# EAGLE board charger (EAGLE 7.4.0)
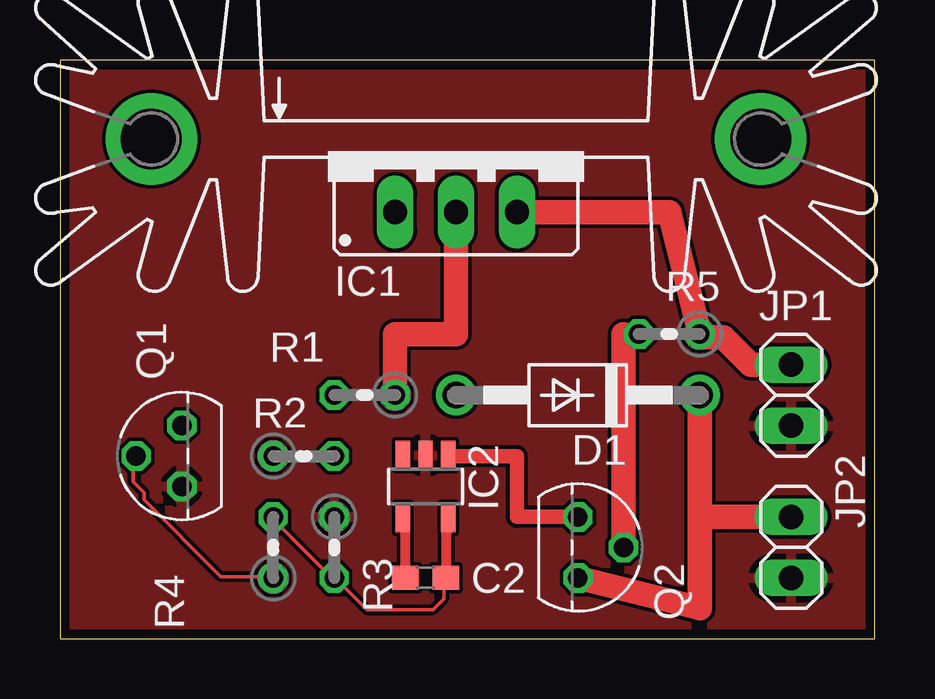
[diagram p0: board, top side]
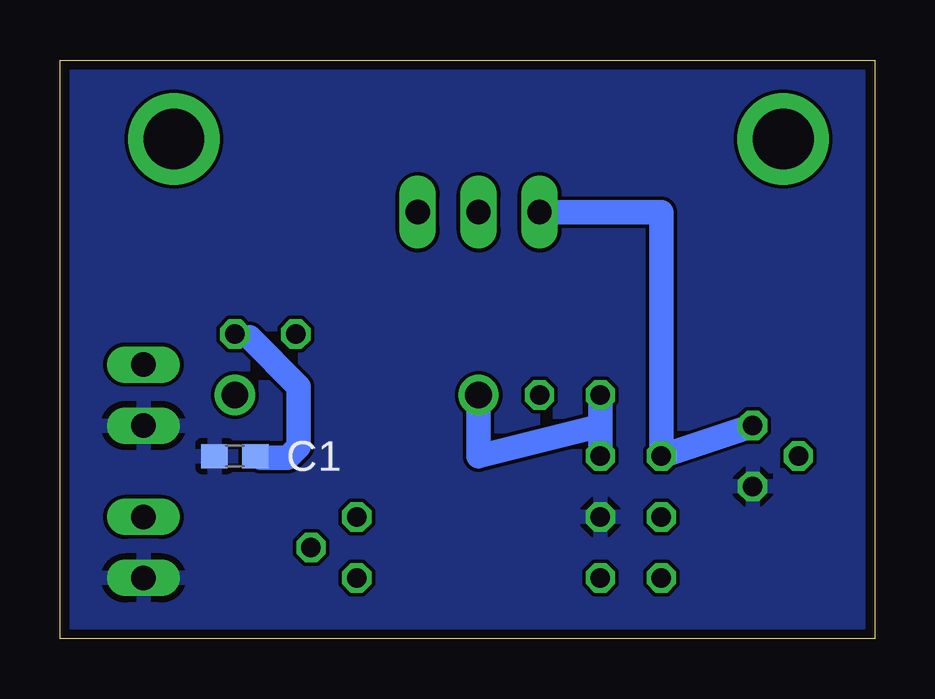
[diagram p1: board, bottom side, seen from below]

Size 33.96 x 24.12 mm. Coordinates in mm from the lower left corner, seen from the top.
Outline: 0,0 33.96,0 33.96,24.12 0,24.12 0,0
Copper layers (1*16): Top 0.0356mm / dielectric 1.5011mm / Bottom 0.0356mm
Design rules "LaenPCBOrder": minimum track width 6mil, minimum drill 13mil, track to track 6mil, track to pad 6mil, pad to pad 6mil, via to via 6mil, smd to smd 6mil, copper to edge 15mil, drill to drill 6mil, minimum pad ring 7mil, minimum via ring 7mil, stop-mask expansion 3mil, vias tented up to drill 0mil, thermal gap 10mil

## Footprints (pad centres in the part's own frame; a part is rotated, then mirrored left to right if it is on the bottom)
C0603 = smd 1.1 x 1: 1 -0.85,0; 2 0.85,0
DO41-10 = drill 1.118: A 5.08,0; C -5.08,0
317TS = drill 1.016 long: 1 -2.54,-2.54; 2 0,-2.54; 3 2.54,-2.54
SOT23-5 = smd 0.6 x 1.2: 1 -0.95,-1.306; 2 0,-1.306; 3 0.95,-1.306; 4 0.95,1.306; 5 -0.95,1.306
1X02 = drill 1.016 long: 1 -1.27,0; 2 1.27,0
SK104-PAD = drill 2.54 pad 3.81: K1 -12.7,-0.762; K2 12.7,-0.762
TO92 = drill 0.813 octagon: 1 -1.27,0; 2 0,1.905; 3 1.27,0
0204V = drill 0.813 octagon: 1 -1.27,0; 2 1.27,0

## Placement (x,y rotation side)
C1  1mf  [C0603]  26.67,7.62 180 bottom
C2  10n  [C0603]  15.24,2.54 0 top
D1  1N4001  [DO41-10]  21.59,10.16 180 top
IC1  LM317  [317TS]  16.51,20.32 0 top
IC2  LM3420AM5X-8.4  [SOT23-5]  15.24,6.35 180 top
JP1  DC IN  [1X02]  30.48,10.16 270 top
JP2  BAT  [1X02]  30.48,3.81 270 top
KK1  SK104-PAD  [SK104-PAD]  16.51,21.59 0 top
Q1  [TO92]  5.08,7.62 90 top
Q2  [TO92]  21.59,3.81 270 top
R1  36R  [0204V]  12.7,10.16 180 top
R2  1k  [0204V]  10.16,7.62 0 top
R3  100k  [0204V]  11.43,3.81 270 top
R4  1k  [0204V]  8.89,3.81 90 top
R5  10k  [0204V]  25.4,12.7 180 top

## Library data of the parts
C1 C2 = resistor
D1 = diode
IC1 = v-reg
IC2 Q1 Q2 = custom
JP1 JP2 = pinhead
KK1 = heatsink
R1-R5 = rcl

## Nets
GND: C1.2 IC2.2 JP1.2 JP2.2 Q1.1 R3.1
N$1: IC1.2 R1.1
N$2: D1.A R1.2 R2.2
N$3: IC1.1 Q1.3 R2.1
N$5: C2.2 IC2.5 R3.2 R4.2
N$6: IC2.1 Q2.1
N$7: Q1.2 R4.1
N$8: Q2.2 R5.2
N$9: D1.C JP2.1 Q2.3
N$10: C2.1 IC2.4
V+: C1.1 IC1.3 JP1.1 R5.1

## Tracks (layer width: path | path; a pad name or v marks a point on that pad's centre or on a via)
GND
  pour Top: 0,24.13 34.29,24.13 34.29,0 0,0
  pour Bottom: 0,24.13 34.29,24.13 34.29,0 0,0
N$1
  Top 1.016: IC1.2 16.51,12.7 13.97,12.7 R1.1
N$2
  Bottom 0.254: 16.46,10.06 D1.A
  Bottom 1.016: 11.43,8.89 R2.2 | R1.2 11.43,8.89 | 11.43,8.89 16.51,7.62 D1.A
N$3
  Bottom 0.254: 8.69,7.77 R2.1
  Bottom 1.016: IC1.1 8.89,17.78 R2.1 Q1.3
N$5
  Top 0.152: C2.2 16,2.44 16,1.68 15.54,1.22 12.8,1.22 11.43,2.59 R3.2 11.43,2.44 8.99,4.88 8.99,5.03 R4.2
  Top 0.254: 16.23,4.57 16.23,5.03 IC2.5
  Top 0.406: 16.23,4.57 16.09,4.57 C2.2
N$6
  Top 0.254: 16.23,7.54 IC2.1 16.23,7.77
  Top 0.61: Q2.1 19.05,5.08 19.05,7.62 16.19,7.62 IC2.1
N$7
  Top 0.152: Q1.2 3.05,7.62 3.05,6.55 3.5,6.1 3.5,5.79 6.71,2.59 8.84,2.59 R4.1
N$8
  Top 0.61: R5.2 23.5,12.7
  Top 1.016: 23.5,12.7 Q2.2
N$9
  Top 1.016: D1.C 26.67,5.08 | 26.67,5.08 JP2.1 | Q2.3 26.67,1.27 26.67,5.08
  Bottom 0.254: 30.4,5.03 JP2.1
N$10
  Top 0.254: 14.4,5.03 IC2.4
  Top 0.406: IC2.4 14.39,5.04 C2.1
V+
  Top 0.254: 26.75,12.57 R5.1
  Top 1.016: IC1.3 25.4,17.78 R5.1 | 26.75,12.57 27.66,12.57 28.8,11.43 JP1.1
  Bottom 0.254: 26.06,12.57 26.52,12.57 R5.1 | 25.6,7.54 C1.1
  Bottom 1.016: 25.6,7.54 24.46,7.54 24,8 24,10.52 26.06,12.57